# Altium PCB Pcb.PcbDoc
Units mm, origin at the board's own origin, x right, y up, seen from the top; angles counter-clockwise.
Board outline 160 x 110 mm, 2 copper layers (Top Layer, Bottom Layer), stack 1.895 mm thick; 6 components, 62 nets, 87 pads, 0 vias.
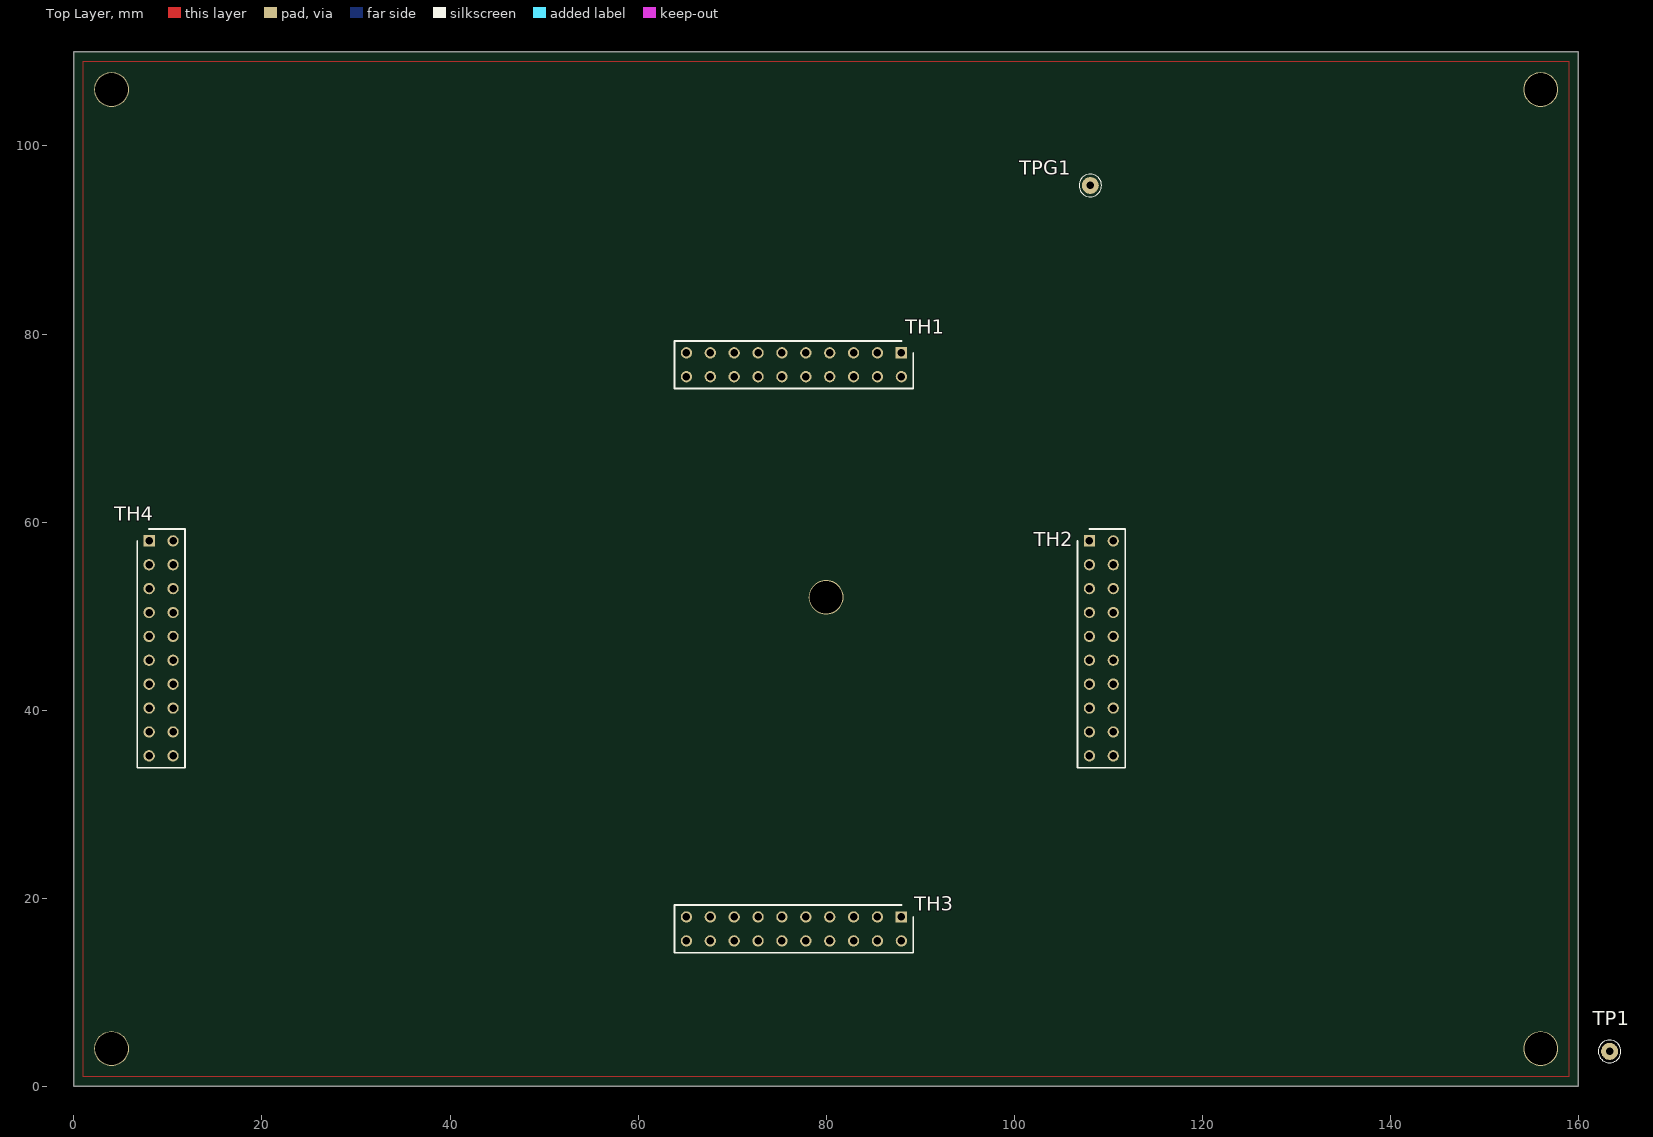
[diagram p0: Top Layer view]
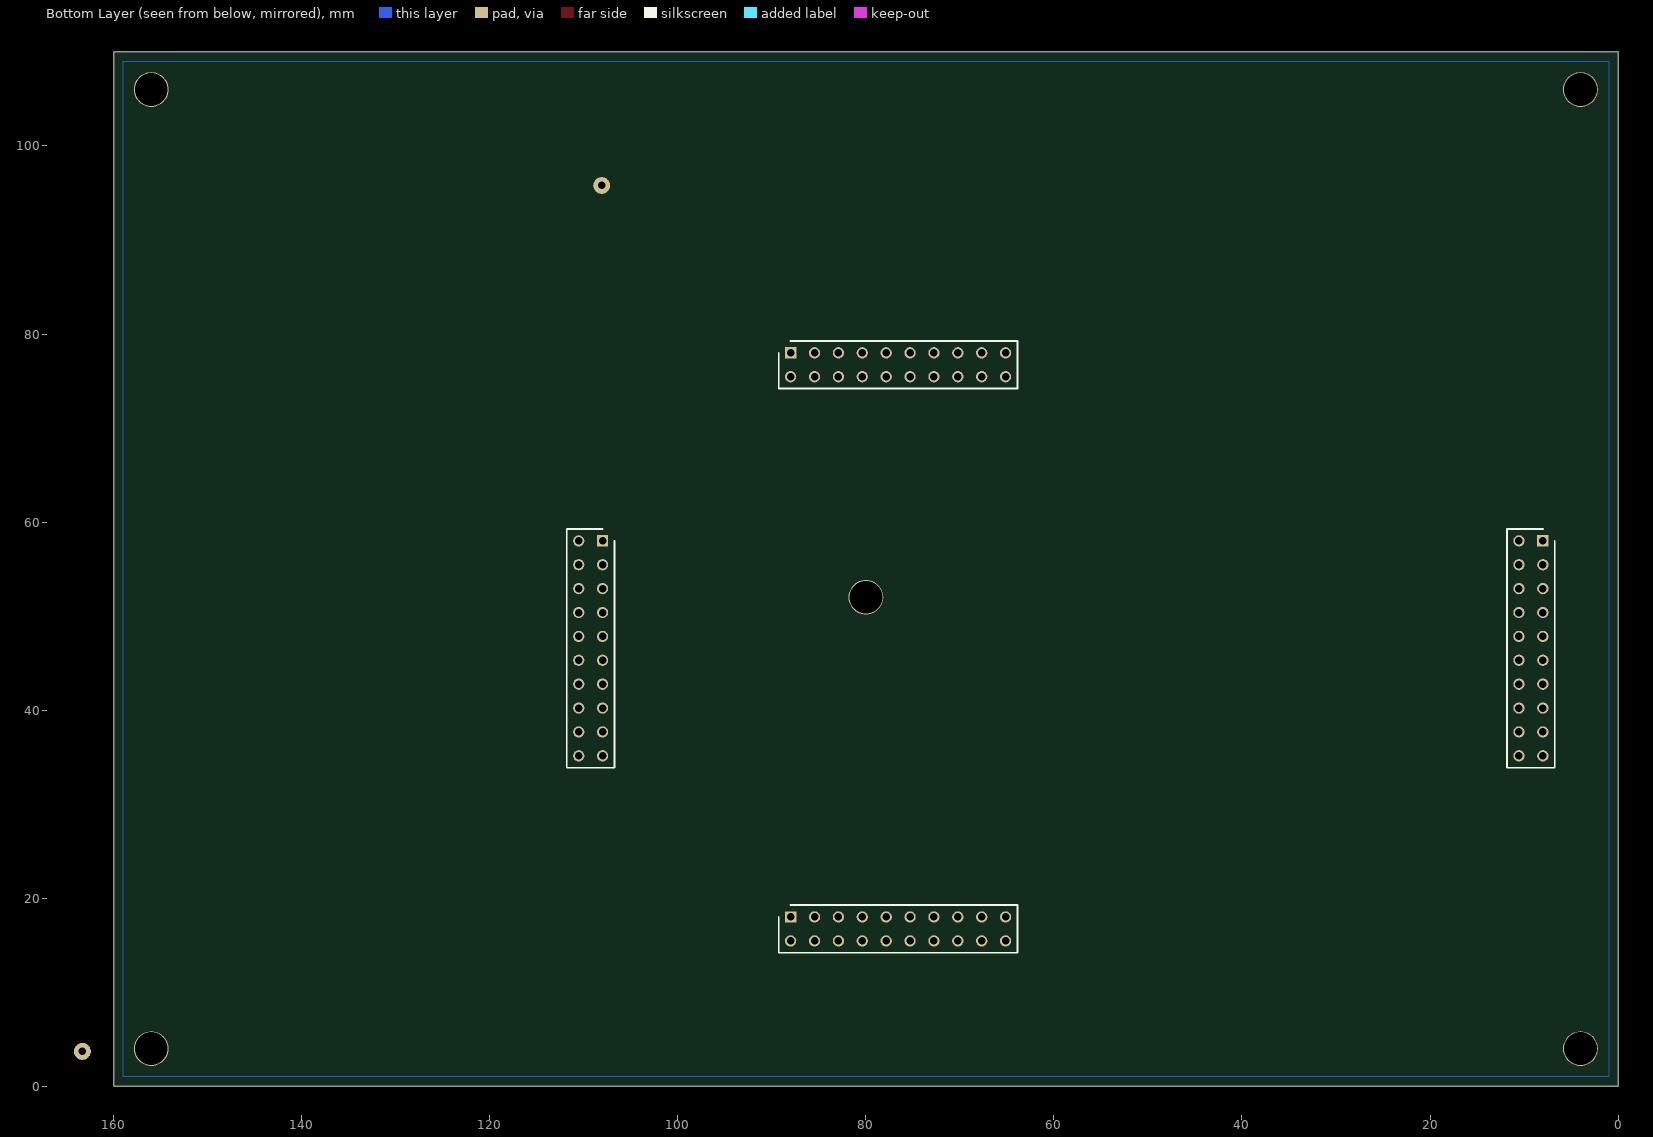
[diagram p1: Bottom Layer view, seen from below]

## Layer stack, top to bottom
Top Solder: solder mask 0.0102, Solder Resist, Dk 3.5
Top Layer: signal copper 0.0152
Dielectric 1: dielectric 1.865, FR-4, Dk 4.8
Bottom Layer: signal copper 0.0152
Bottom Solder: solder mask 0.0102, Solder Resist, Dk 3.5

## Board outline
0,0 0,110 160,110 160,0

## Design rules (kind name [scope] priority, off if disabled: settings)
Clearance [All] p1: gap=0.2 ignorepadtopadclearanceinfootprint=FALSE except(0.12: Arc-Arc Arc-Track Track-Track)
DiffPairsRouting [All] p1: maxlimit=0.6 minlimit=0.1 mostfreqgap=0.2 toplayer_minwidth=0.1 toplayer_maxwidth=0.6 toplayer_prefwidth=0.12 bottomlayer_minwidth=0.1 bottomlayer_maxwidth=0.6 bottomlayer_prefwidth=0.12 maxuncoupledlength=12.7
HoleSize [All] p1: absolutevalues=TRUE maxlimit=4 minlimit=0.025 maxpercent=80.000 minpercent=20.000
MinimumSolderMaskSliver [All] p1: minsoldermaskwidth=0.2
PolygonConnect [All] p1: connectstyle=Relief reliefconductorwidth=0.254 reliefentries=4 polygonreliefangle="90 Angle" airgapwidth=0.254
RoutingVias [All] p1: holewidth=0.3 width=0.5 viastyle="Through Hole" minholewidth=0.3 minwidth=0.5 maxholewidth=0.3 maxwidth=0.5
SilkToSilkClearance [All] p1: silktosilkclearance=0.2
SilkToSolderMaskClearance [IsPad] p1: minsilkscreentomaskgap=0.2 clearancetoexposedcopper=TRUE
SolderMaskExpansion [All] p1: expansion=0.102 istentingtop=FALSE
SupplyNets "Schematic Supply Nets" [InNet('GND')] p1: voltage=0.000
Width [All] p1: maxlimit=0.6 minlimit=0.12 preferedwidth=0.2
25 further rules are at their usual default settings.

## Classes and differential pairs
component class U_TH4: ` TH4
component class U_TH3: ` TH3
component class U_TH2: ` TH2
component class U_TH1: ` TH1
component class Top: ` TP1 TPG1

## Components (designator, comment, footprint, x,y, rotation, side; value= is the part's Value field where it differs from the comment)
TH1 "90151-2120" 90151-2120 88,78 r180 top
TH2 "90151-2120" 90151-2120 108,58 r270 top
TH3 "90151-2120" 90151-2120 88,18 r180 top
TH4 "90151-2120" 90151-2120 8,58 r270 top
TP1 "S13-503-SISTEMI" CMP-001-0000-3 163.325,3.7 r0 top
TPG1 "S13-503-SISTEMI" CMP-001-0000-3 108.1,95.8 r180 top

## Footprints (in the part's own frame and the unit in brackets; to place one, negate y for a bottom-side part, rotate by r counter-clockwise, add the part's x,y. Pads: shape width x height; smd on the part's side, far side on the other; paste and mask are expansions set on the pad)
90151-2120 [mm]
  rect 1.2x1.2 hole 0.8: 1(0,0)
  round 1.2 hole 0.8: 2(0,2.54) 3(2.54,0) 4(2.54,2.54) 5(5.08,0) 6(5.08,2.54) 7(7.62,0) 8(7.62,2.54) 9(10.16,0) 10(10.16,2.54) 11(12.7,0) 12(12.7,2.54) 13(15.24,0) 14(15.24,2.54) 15(17.78,0) 16(17.78,2.54) 17(20.32,0) 18(20.32,2.54) 19(22.86,0) 20(22.86,2.54)
  silkscreen extent -1.27,-1.27 24.13,3.81, body extent -1.27,-1.27 24.13,3.81, height 8.38
CMP-001-0000-3 [mm]
  round 1.8 hole 0.8 mask-2539.97: 1(0,0)
  silkscreen extent -1.2,-1.2 1.2,1.2, body extent -0.49,-0.48 0.49,0.48, height 12.72

## Part data
TH1 TH2 TH3 TH4: "Connector", Manufacturer_Name=Molex, Mouser Part Number=538-90151-2120, Datasheet Link=https://www.molex.com/pdm_docs/sd/901512120_sd.pdf, Height=8.7mm, Manufacturer_Part_Number=90151-2120, Mouser Price/Stock=https://www.mouser.co.uk/ProductDetail/Molex/90151-2120?qs=XmV31zLAuMHqFInYdcmaXg%3D%3D
TP1: library part CMP-001-0000-3, "Sistemi Version of Hirose S13-503"
TPG1: library part CMP-001-0000-3_GND, "Sistemi Version of Hirose S13-503 (GND)"

## Free pads (board coordinates)
  round 3.7 hole 3.5: 3(4,4) 3(4,106) 3(80,52) 3(156,4) 3(156,106)

## Nets (pads, with @x,y where several pads share a name; then routed paths per layer and width w, separated by ;. In a path a pad name is that pad's centre, name@x,y a point inside that pad or via, vN(x,y) a via of type N, cw(c..) or ccw(c..) an arc to the next point about the centre after c; other vN are vias at no path point)
GND: pad.3@4,4 TH1.11 TH1.12 TH1.17 TH1.18 TH2.11 TH2.12 TH2.17 TH2.18 TH3.11 TH3.12 TH3.17 TH3.18 TH4.11 TH4.12 TH4.17 TH4.18 TPG1.1
NetTH1_1: TH1.1
NetTH1_2: TH1.2
NetTH1_3: TH1.3
NetTH1_4: TH1.4
NetTH1_5: TH1.5
NetTH1_6: TH1.6
NetTH1_7: TH1.7
NetTH1_8: TH1.8
NetTH1_9: TH1.9
NetTH1_10: TH1.10
NetTH1_13: TH1.13
NetTH1_14: TH1.14
NetTH1_16: TH1.16
NetTH1_19: TH1.19
NetTH1_20: TH1.20
NetTH2_1: TH2.1
NetTH2_2: TH2.2
NetTH2_3: TH2.3
NetTH2_4: TH2.4
NetTH2_5: TH2.5
NetTH2_6: TH2.6
NetTH2_8: TH2.8
NetTH2_9: TH2.9
NetTH2_10: TH2.10
NetTH2_13: TH2.13
NetTH2_14: TH2.14
NetTH2_15: TH2.15
NetTH2_16: TH2.16
NetTH2_19: TH2.19
NetTH2_20: TH2.20
NetTH3_1: TH3.1
NetTH3_2: TH3.2
NetTH3_3: TH3.3
NetTH3_4: TH3.4
NetTH3_5: TH3.5
NetTH3_6: TH3.6
NetTH3_7: TH3.7
NetTH3_8: TH3.8
NetTH3_10: TH3.10
NetTH3_13: TH3.13
NetTH3_14: TH3.14
NetTH3_15: TH3.15
NetTH3_16: TH3.16
NetTH3_19: TH3.19
NetTH3_20: TH3.20
NetTH4_1: TH4.1
NetTH4_2: TH4.2
NetTH4_3: TH4.3
NetTH4_4: TH4.4
NetTH4_5: TH4.5
NetTH4_6: TH4.6
NetTH4_7: TH4.7
NetTH4_8: TH4.8
NetTH4_9: TH4.9
NetTH4_10: TH4.10
NetTH4_13: TH4.13
NetTH4_14: TH4.14
NetTH4_15: TH4.15
NetTH4_16: TH4.16
NetTH4_19: TH4.19
NetTH4_20: TH4.20
pads on no net: TH1.15 TH2.7 TH3.9 TP1.1

## Polygon pours and split planes (outlines as drawn)
GND on Bottom Layer "NONET_L02_P000" (solid, shelved, pour order 0): 1,1 159,1 159,109 1,109
GND on Top Layer "NONET_L01_P003" (solid, shelved, pour order 3): 1,1 1,109 159,109 159,1

## Silkscreen, mask and mechanical layers (free items; w line width, h text height)
Mechanical 1:
  the board outline again, w0.254